# Altium PCB standos_rpi_com.PcbDoc (part 2 of 2)
Units mm, origin at the board's own origin, x right, y up, seen from the top; angles counter-clockwise.
Board outline 197 x 179 mm, 2 copper layers (Top Layer, Bottom Layer); 32 components, 588 nets, 1605 pads, 102 vias.
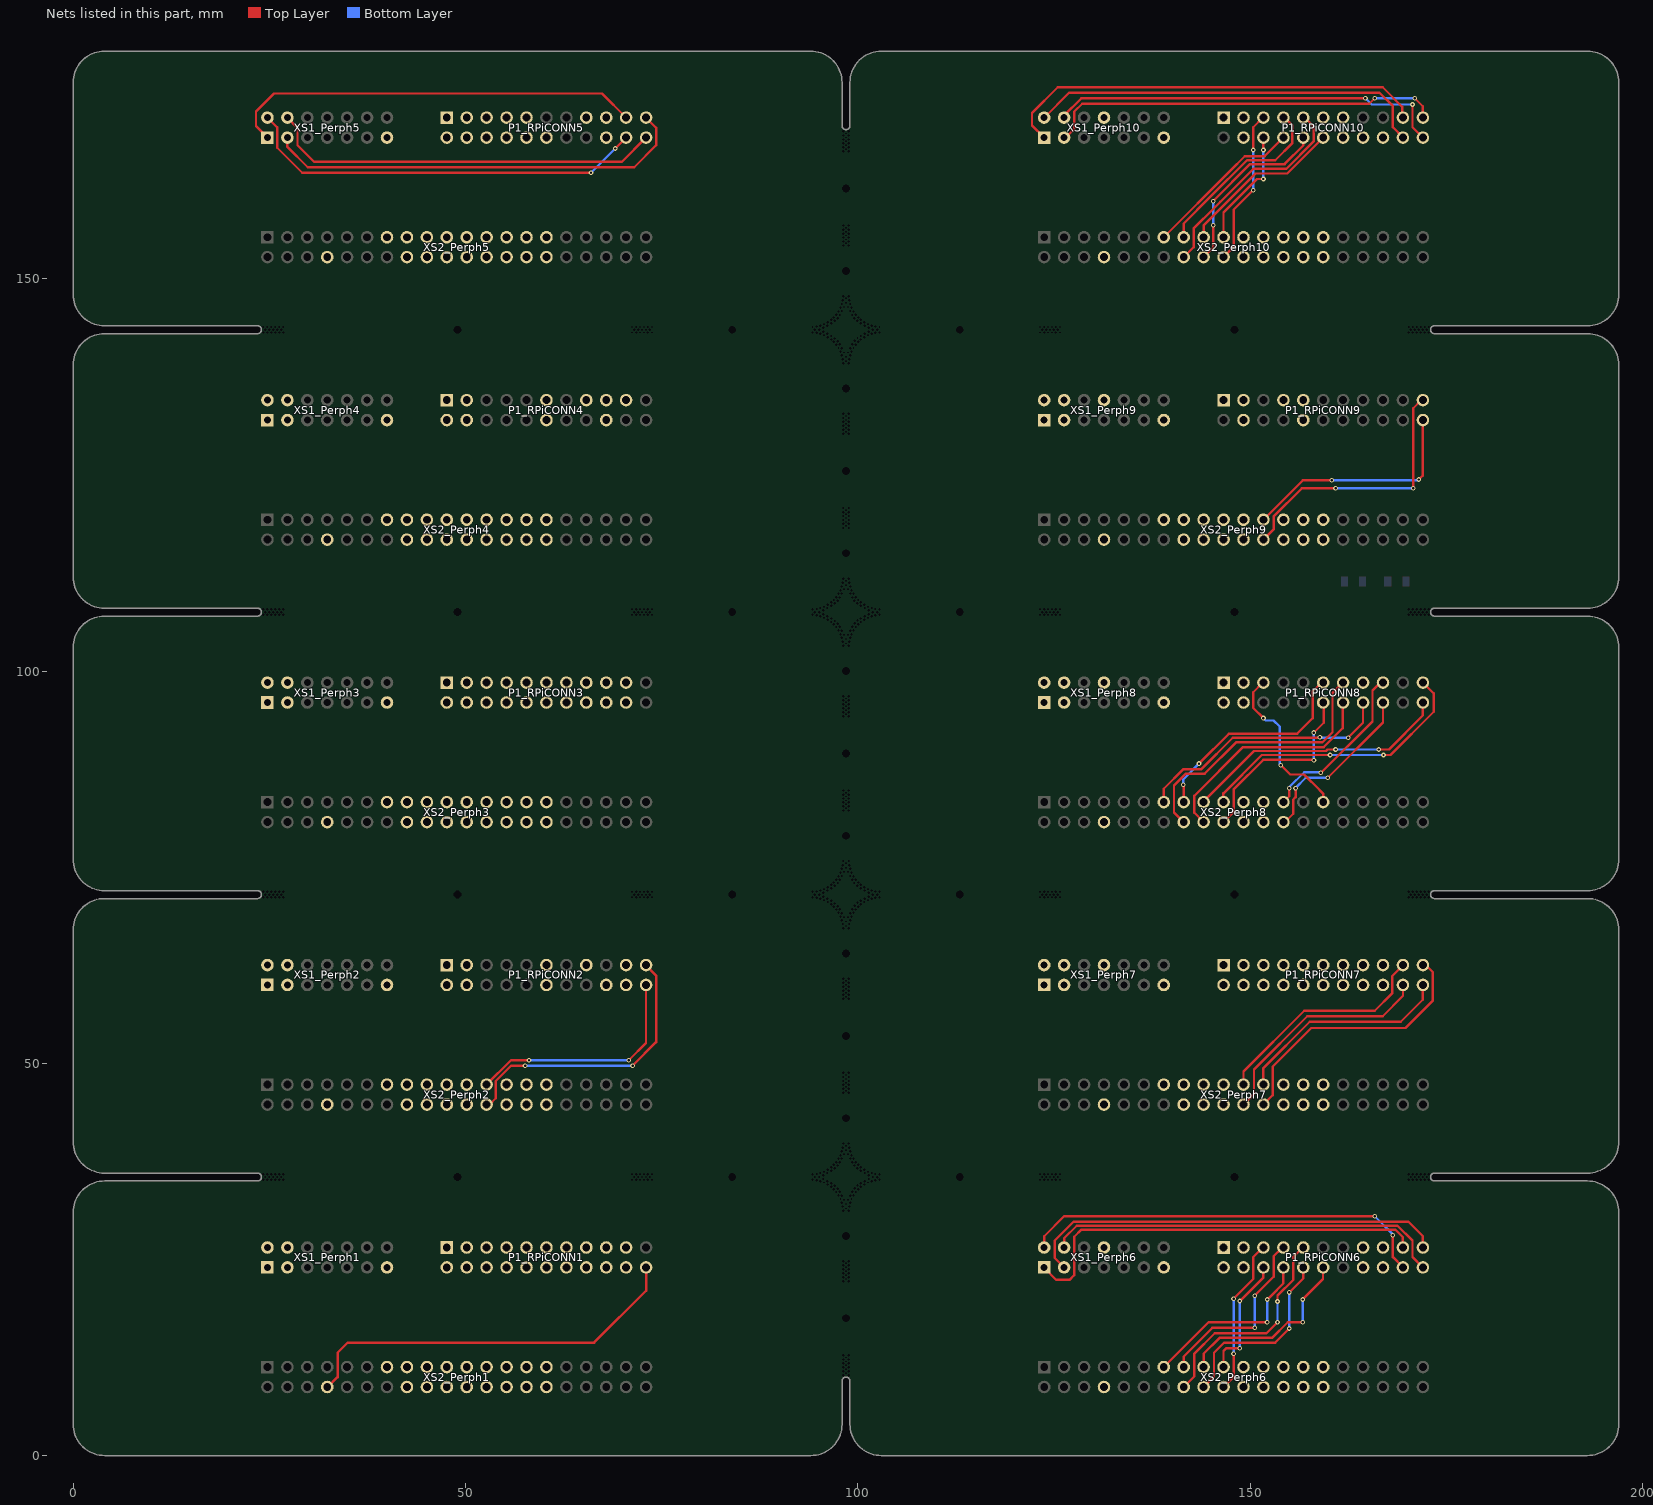
[diagram p2: the nets of this part, all layers, seen from the top]

## Via types
v1: diameter 0.6, hole 0.3, Top Layer to Bottom Layer, 102 vias

## Nets (pads, with @x,y where several pads share a name; then routed paths per layer and width w, separated by ;. In a path a pad name is that pad's centre, name@x,y a point inside that pad or via, vN(x,y) a via of type N, cw(c..) or ccw(c..) an arc to the next point about the centre after c; other vN are vias at no path point) (continued)
GYROSCOPE.SDO_Perph6: XS1_Perph6.8
GYROSCOPE.SDO_Perph7: XS1_Perph7.8
GYROSCOPE.SDO_Perph8: XS1_Perph8.8
GYROSCOPE.SDO_Perph9: XS1_Perph9.8
GYROSCOPE.SDO_Perph10: XS1_Perph10.8
KEYPAD.Col0_Perph1: XS2_Perph1.16
KEYPAD.Col0_Perph2: XS2_Perph2.16
KEYPAD.Col0_Perph3: XS2_Perph3.16
KEYPAD.Col0_Perph4: XS2_Perph4.16
KEYPAD.Col0_Perph5: XS2_Perph5.16
KEYPAD.Col0_Perph6: P1_RPiCONN6.9 XS2_Perph6.16 | length 27.9
  Top Layer w0.3: XS2_Perph6.16@141.54,8.745 142.9,10.105 142.9,13 145.5,15.6 152.1,15.6 v1(153.5,17) ; v1(153.5,19.65) 153.5,20.4 155.5,22.4 155.5,25.3 P1_RPiCONN6.9@156.7,26.5
  Bottom Layer w0.3: v1(153.5,17) 153.5,19.5 v1(153.5,19.65)
KEYPAD.Col0_Perph7: XS2_Perph7.16
KEYPAD.Col0_Perph8: P1_RPiCONN8.13 XS2_Perph8.16 | length 34.9
  Top Layer w0.3: XS2_Perph8.16@141.54,80.745 140.3,81.985 140.3,85.4 141.824,86.924 144.224,86.924 148.2,90.9 159.2,90.9 160.5,92.2 160.5,97.2 P1_RPiCONN8.13@161.7,98.4
KEYPAD.Col0_Perph9: XS2_Perph9.16
KEYPAD.Col0_Perph10: P1_RPiCONN10.9 XS2_Perph10.16 | length 27.8
  Top Layer w0.3: XS2_Perph10.16@141.54,152.745 142.8,154.005 142.8,156.393 145.517,159.11 146.2,159.793 150.407,164 154.6,164 158.1,167.5 158.1,169.4 156.9,170.6 P1_RPiCONN10.9@156.8,170.6
KEYPAD.Col1_Perph1: XS2_Perph1.13
KEYPAD.Col1_Perph2: XS2_Perph2.13
KEYPAD.Col1_Perph3: XS2_Perph3.13
KEYPAD.Col1_Perph4: XS2_Perph4.13
KEYPAD.Col1_Perph5: XS2_Perph5.13
KEYPAD.Col1_Perph6: P1_RPiCONN6.8 XS2_Perph6.13 | length 23.4
  Top Layer w0.3: XS2_Perph6.13@139,11.285 144.715,17 v1(152.168,17) ; v1(152.2,19.9) 152.65,20.35 154.24,21.94 P1_RPiCONN6.8@154.24,23.985
  Bottom Layer w0.3: v1(152.168,17) 152.2,17 v1(152.2,19.9)
KEYPAD.Col1_Perph7: XS2_Perph7.13
KEYPAD.Col1_Perph8: P1_RPiCONN8.16 XS2_Perph8.13 | length 33.3
  Top Layer w0.3: XS2_Perph8.13@139,83.285 139,85 141.5,87.5 143.8,87.5 147.8,91.5 158.9,91.5 v1(158.9,91.55) ; v1(162.5,91.5) 164.4,93.4 P1_RPiCONN8.16@164.4,95.985
  Bottom Layer w0.3: v1(158.9,91.55) 158.9,91.5 v1(162.5,91.5)
KEYPAD.Col1_Perph9: XS2_Perph9.13
KEYPAD.Col1_Perph10: P1_RPiCONN10.8 XS2_Perph10.13 | length 20.5
  Top Layer w0.3: XS2_Perph10.13@139,155.285 147.515,163.8 149.315,165.6 151.855,165.6 P1_RPiCONN10.8@154.24,167.985
KEYPAD.Col2_Perph1: XS2_Perph1.18
KEYPAD.Col2_Perph2: XS2_Perph2.18
KEYPAD.Col2_Perph3: XS2_Perph3.18
KEYPAD.Col2_Perph4: XS2_Perph4.18
KEYPAD.Col2_Perph5: XS2_Perph5.18
KEYPAD.Col2_Perph6: P1_RPiCONN6.10 XS2_Perph6.18 | length 24.2
  Top Layer w0.3: XS2_Perph6.18@144.08,8.745 145.4,10.065 145.4,13.1 146.7,14.4 153.2,14.4 v1(155,16.2) ; v1(155,20.8) 156.8,22.6 P1_RPiCONN6.10@156.8,23.9
  Bottom Layer w0.3: v1(155,16.2) v1(155,20.8)
KEYPAD.Col2_Perph7: XS2_Perph7.18
KEYPAD.Col2_Perph8: P1_RPiCONN8.14 XS2_Perph8.18 | length 29.6
  Top Layer w0.3: XS2_Perph8.18@144.08,80.745 142.9,81.925 142.9,84.1 149.1,90.3 155.837,90.3 157.363,90.3 159.4,90.3 161.8,92.7 P1_RPiCONN8.14@161.8,96
KEYPAD.Col2_Perph9: XS2_Perph9.18
KEYPAD.Col2_Perph10: P1_RPiCONN10.10 XS2_Perph10.18 | length 23.1
  Top Layer w0.3: XS2_Perph10.18@144.08,152.745 145.3,153.965 v1(145.3,156.8) ; v1(145.31,159.89) 145.3,159.9 150,164.6 154.4,164.6 156.78,166.98 P1_RPiCONN10.10@156.78,167.985
  Bottom Layer w0.3: v1(145.3,156.8) 145.3,159.89 v1(145.31,159.89)
KEYPAD.Row0_Perph1: XS2_Perph1.15
KEYPAD.Row0_Perph2: XS2_Perph2.15
KEYPAD.Row0_Perph3: XS2_Perph3.15
KEYPAD.Row0_Perph4: XS2_Perph4.15
KEYPAD.Row0_Perph5: XS2_Perph5.15
KEYPAD.Row0_Perph6: P1_RPiCONN6.7 XS2_Perph6.15 | length 23.5
  Top Layer w0.3: XS2_Perph6.15@141.54,11.285 141.54,12.64 145.2,16.3 v1(150.6,16.3) ; v1(150.61,20.39) 150.6,20.4 153,22.8 153,25.4 P1_RPiCONN6.7@154,26.4
  Bottom Layer w0.3: v1(150.6,16.3) 150.6,20.39 v1(150.61,20.39)
KEYPAD.Row0_Perph7: XS2_Perph7.15
KEYPAD.Row0_Perph8: P1_RPiCONN8.11 XS2_Perph8.15 | length 27.8
  Top Layer w0.3: v1(141.5,85.5) 141.54,85.46 XS2_Perph8.15@141.54,83.285 ; v1(143.5,88.2) 147.3,92 156,92 158,94 158,97.4 P1_RPiCONN8.11@159.2,98.6
  Bottom Layer w0.3: v1(141.5,85.5) 141.5,86.2 v1(143.5,88.2)
KEYPAD.Row0_Perph9: XS2_Perph9.15
KEYPAD.Row0_Perph10: P1_RPiCONN10.7 XS2_Perph10.15 | length 23.8
  Top Layer w0.3: XS2_Perph10.15@141.54,155.285 141.54,157.04 144.9,160.4 149.6,165.1 153.2,165.1 155.39,167.29 155.39,167.597 155.39,169.51 P1_RPiCONN10.7@154.2,170.7
KEYPAD.Row1_Perph1: XS2_Perph1.20
KEYPAD.Row1_Perph2: XS2_Perph2.20
KEYPAD.Row1_Perph3: XS2_Perph3.20
KEYPAD.Row1_Perph4: XS2_Perph4.20
KEYPAD.Row1_Perph5: XS2_Perph5.20
KEYPAD.Row1_Perph6: P1_RPiCONN6.5 XS2_Perph6.20 | length 20
  Top Layer w0.3: XS2_Perph6.20@146.62,8.745 147.9,10.025 v1(147.9,13) ; v1(147.9,20) 150.4,22.5 150.4,25.3 P1_RPiCONN6.5@151.7,26.6
  Bottom Layer w0.3: v1(147.9,13) v1(147.9,20)
KEYPAD.Row1_Perph7: XS2_Perph7.20
KEYPAD.Row1_Perph8: P1_RPiCONN8.12 XS2_Perph8.20 | length 24.4
  Top Layer w0.3: XS2_Perph8.20@146.62,80.745 147.9,82.025 147.9,84.9 151.7,88.7 158,88.7 158.1,88.6 v1(158.135,88.635) ; v1(158.1,92.15) 158.125,92.125 159.4,93.4 P1_RPiCONN8.12@159.4,95.9
  Bottom Layer w0.3: v1(158.1,92.15) 158.1,92.1 158.1,88.635 v1(158.135,88.635)
KEYPAD.Row1_Perph9: XS2_Perph9.20
KEYPAD.Row1_Perph10: P1_RPiCONN10.5 XS2_Perph10.20 | length 19.8
  Top Layer w0.3: XS2_Perph10.20@146.62,152.745 147.9,154.025 147.9,158.8 150.4,161.3 v1(150.41,161.29) ; v1(150.4,166.4) 150.4,169.3 P1_RPiCONN10.5@151.6,170.5
  Bottom Layer w0.3: v1(150.4,166.4) 150.4,161.3 v1(150.41,161.29)
KEYPAD.Row2_Perph1: XS2_Perph1.19
KEYPAD.Row2_Perph2: XS2_Perph2.19
KEYPAD.Row2_Perph3: XS2_Perph3.19
KEYPAD.Row2_Perph4: XS2_Perph4.19
KEYPAD.Row2_Perph5: XS2_Perph5.19
KEYPAD.Row2_Perph6: P1_RPiCONN6.6 XS2_Perph6.19 | length 15.8
  Top Layer w0.3: XS2_Perph6.19@146.62,11.285 146.62,13.32 147,13.7 v1(148.7,13.7) ; v1(148.7,19.7) 151.7,22.7 P1_RPiCONN6.6@151.7,23.985
  Bottom Layer w0.3: v1(148.7,13.7) 148.7,14.2 v1(148.7,19.7)
KEYPAD.Row2_Perph7: XS2_Perph7.19
KEYPAD.Row2_Perph8: P1_RPiCONN8.21 XS2_Perph8.19 | length 36.6
  Top Layer w0.3: XS2_Perph8.19@146.6,83.2 146.6,84.4 151.485,89.285 157.866,89.285 158.405,89.285 v1@160.185,89.285 ; v1(167,89.3) 167.9,89.3 173.4,94.8 173.4,97.145 P1_RPiCONN8.21@172.02,98.525
  Bottom Layer w0.3: v1(160.2,89.3) v1(167,89.3)
KEYPAD.Row2_Perph9: XS2_Perph9.19
KEYPAD.Row2_Perph10: P1_RPiCONN10.6 XS2_Perph10.19 | length 15.1
  Top Layer w0.3: XS2_Perph10.19@146.62,155.285 146.62,158.42 150.9,162.7 v1(151.7,162.7) ; v1(151.7,166.4) P1_RPiCONN10.6@151.7,167.8
  Bottom Layer w0.3: v1(151.7,162.7) v1(151.7,166.4)
KEYPAD.Row3_Perph1: XS2_Perph1.17
KEYPAD.Row3_Perph2: XS2_Perph2.17
KEYPAD.Row3_Perph3: XS2_Perph3.17
KEYPAD.Row3_Perph4: XS2_Perph4.17
KEYPAD.Row3_Perph5: XS2_Perph5.17
KEYPAD.Row3_Perph6: P1_RPiCONN6.12 XS2_Perph6.17 | length 24.1
  Top Layer w0.3: XS2_Perph6.17@144.08,11.285 144.08,12.98 146.1,15 152.8,15 154.8,17 v1(156.7,17) ; v1(156.7,19.9) 159.3,22.5 P1_RPiCONN6.12@159.3,24
  Bottom Layer w0.3: v1(156.7,17) v1(156.7,19.9)
KEYPAD.Row3_Perph7: XS2_Perph7.17
KEYPAD.Row3_Perph8: P1_RPiCONN8.22 XS2_Perph8.17 | length 34.2
  Top Layer w0.3: XS2_Perph8.17@144,83.3 150.5,89.8 156.044,89.8 159.681,89.8 159.731,89.85 159.881,90 v1(160.9,90) ; v1(166.4,90) 167.7,90 172.02,94.32 P1_RPiCONN8.22@172.02,95.985
  Bottom Layer w0.3: v1(160.9,90) v1(166.4,90)
KEYPAD.Row3_Perph9: XS2_Perph9.17
KEYPAD.Row3_Perph10: P1_RPiCONN10.12 XS2_Perph10.17 | length 21.4
  Top Layer w0.3: XS2_Perph10.17@144.08,155.285 144.08,156.78 150.7,163.4 154.735,163.4 P1_RPiCONN10.12@159.32,167.985
MICROPHONE_DS_Perph1: P1_RPiCONN1.22 XS2_Perph1.8 | length 50.5
  Top Layer w0.3: XS2_Perph1.8@32.4,8.7 33.7,10 33.7,13.1 35,14.4 66.4,14.4 73.02,21.02 P1_RPiCONN1.22@73.02,23.985
MICROPHONE_DS_Perph2: XS2_Perph2.8
MICROPHONE_DS_Perph3: XS2_Perph3.8
MICROPHONE_DS_Perph4: XS2_Perph4.8
MICROPHONE_DS_Perph5: XS2_Perph5.8
MICROPHONE_DS_Perph6: XS2_Perph6.8
MICROPHONE_DS_Perph7: XS2_Perph7.8
MICROPHONE_DS_Perph8: XS2_Perph8.8
MICROPHONE_DS_Perph9: XS2_Perph9.8
MICROPHONE_DS_Perph10: XS2_Perph10.8
NetP1_RPiCONN1_1: P1_RPiCONN1.1
NetP1_RPiCONN1_2: P1_RPiCONN1.2
NetP1_RPiCONN1_15: P1_RPiCONN1.15
NetP1_RPiCONN2_1: P1_RPiCONN2.1
NetP1_RPiCONN2_2: P1_RPiCONN2.2
NetP1_RPiCONN2_15: P1_RPiCONN2.15
NetP1_RPiCONN3_1: P1_RPiCONN3.1
NetP1_RPiCONN3_2: P1_RPiCONN3.2
NetP1_RPiCONN3_15: P1_RPiCONN3.15
NetP1_RPiCONN4_1: P1_RPiCONN4.1
NetP1_RPiCONN4_2: P1_RPiCONN4.2
NetP1_RPiCONN4_15: P1_RPiCONN4.15
NetP1_RPiCONN5_1: P1_RPiCONN5.1
NetP1_RPiCONN5_2: P1_RPiCONN5.2
NetP1_RPiCONN5_15: P1_RPiCONN5.15
NetP1_RPiCONN6_1: P1_RPiCONN6.1
NetP1_RPiCONN6_2: P1_RPiCONN6.2
NetP1_RPiCONN6_15: P1_RPiCONN6.15
NetP1_RPiCONN7_1: P1_RPiCONN7.1
NetP1_RPiCONN7_2: P1_RPiCONN7.2
NetP1_RPiCONN7_15: P1_RPiCONN7.15
NetP1_RPiCONN8_1: P1_RPiCONN8.1
NetP1_RPiCONN8_2: P1_RPiCONN8.2
NetP1_RPiCONN8_15: P1_RPiCONN8.15
NetP1_RPiCONN9_1: P1_RPiCONN9.1
NetP1_RPiCONN10_1: P1_RPiCONN10.1
PGND_Perph1: XS1_Perph1.13
PGND_Perph2: XS1_Perph2.13
PGND_Perph3: XS1_Perph3.13
PGND_Perph4: XS1_Perph4.13
PGND_Perph5: XS1_Perph5.13
PGND_Perph6: XS1_Perph6.13
PGND_Perph7: XS1_Perph7.13
PGND_Perph8: XS1_Perph8.13
PGND_Perph9: XS1_Perph9.13
PGND_Perph10: XS1_Perph10.13
RFID.IRQ_Perph1: XS2_Perph1.25
RFID.IRQ_Perph2: XS2_Perph2.25
RFID.IRQ_Perph3: XS2_Perph3.25
RFID.IRQ_Perph4: XS2_Perph4.25
RFID.IRQ_Perph5: XS2_Perph5.25
RFID.IRQ_Perph6: XS2_Perph6.25
RFID.IRQ_Perph7: XS2_Perph7.25
RFID.IRQ_Perph8: P1_RPiCONN8.17 XS2_Perph8.25 | length 21.9
  Top Layer w0.3: XS2_Perph8.25@154.24,83.285 155,84.045 v1(155,85.05) ; v1(159.025,87.05) 159.05,87.025 165.6,93.575 165.6,97.5 P1_RPiCONN8.17@166.7,98.6
  Bottom Layer w0.3: v1(155,85.05) 155,85.1 155,85.2 156.9,87.1 158.9,87.1 159,87 159.025,87.025 v1(159.025,87.05)
RFID.IRQ_Perph9: XS2_Perph9.25
RFID.IRQ_Perph10: XS2_Perph10.25
RFID.RST_Perph1: XS2_Perph1.26
RFID.RST_Perph2: XS2_Perph2.26
RFID.RST_Perph3: XS2_Perph3.26
RFID.RST_Perph4: XS2_Perph4.26
RFID.RST_Perph5: XS2_Perph5.26
RFID.RST_Perph6: XS2_Perph6.26
RFID.RST_Perph7: XS2_Perph7.26
RFID.RST_Perph8: P1_RPiCONN8.18 XS2_Perph8.26 | length 22.1
  Top Layer w0.3: XS2_Perph8.26@154.4,80.7 155.5,81.8 155.5,82.607 155.5,83.631 155.8,83.931 v1(155.8,85.05) ; v1(159.9,86.4) 166.94,93.44 P1_RPiCONN8.18@166.94,95.985
  Bottom Layer w0.3: v1(155.8,85.05) 155.8,85.1 157.1,86.4 v1(159.9,86.4)
RFID.RST_Perph9: XS2_Perph9.26
RFID.RST_Perph10: XS2_Perph10.26
RFID.SPI.MISO_Perph1: XS2_Perph1.28
RFID.SPI.MISO_Perph2: XS2_Perph2.28
RFID.SPI.MISO_Perph3: XS2_Perph3.28
RFID.SPI.MISO_Perph4: XS2_Perph4.28
RFID.SPI.MISO_Perph5: XS2_Perph5.28
RFID.SPI.MISO_Perph6: XS2_Perph6.28
RFID.SPI.MISO_Perph7: XS2_Perph7.28
RFID.SPI.MISO_Perph9: XS2_Perph9.28
RFID.SPI.MISO_Perph10: XS2_Perph10.28
RFID.SPI.MOSI_Perph1: XS2_Perph1.27
RFID.SPI.MOSI_Perph2: XS2_Perph2.27
RFID.SPI.MOSI_Perph3: XS2_Perph3.27
RFID.SPI.MOSI_Perph4: XS2_Perph4.27
RFID.SPI.MOSI_Perph5: XS2_Perph5.27
RFID.SPI.MOSI_Perph6: XS2_Perph6.27
RFID.SPI.MOSI_Perph7: XS2_Perph7.27
RFID.SPI.MOSI_Perph9: XS2_Perph9.27
RFID.SPI.MOSI_Perph10: XS2_Perph10.27
RFID.SPI.nCE_Perph1: XS2_Perph1.29
RFID.SPI.nCE_Perph2: XS2_Perph2.29
RFID.SPI.nCE_Perph3: XS2_Perph3.29
RFID.SPI.nCE_Perph4: XS2_Perph4.29
RFID.SPI.nCE_Perph5: XS2_Perph5.29
RFID.SPI.nCE_Perph6: XS2_Perph6.29
RFID.SPI.nCE_Perph7: XS2_Perph7.29
RFID.SPI.nCE_Perph8: P1_RPiCONN8.5 XS2_Perph8.29 | length 21
  Top Layer w0.3: P1_RPiCONN8.5@151.6,98.5 150.4,97.3 150.4,95.3 v1(151.7,94) ; v1(153.919,88) 155.119,86.8 156.1,86.8 156.893,86.8 158.896,84.796 158.946,84.746 159,84.693 159.046,84.646 159.096,84.596 159.146,84.546 159.196,84.496 159.32,84.373 159.32,83.58 XS2_Perph8.29@159.32,83.285
  Bottom Layer w0.3: v1(151.7,94) 152,93.7 153,93.7 153.8,92.9 153.8,88.1 153.9,88 v1(153.919,88)
RFID.SPI.nCE_Perph9: XS2_Perph9.29
RFID.SPI.nCE_Perph10: XS2_Perph10.29
RFID.SPI.SCLK_Perph1: XS2_Perph1.30
RFID.SPI.SCLK_Perph2: XS2_Perph2.30
RFID.SPI.SCLK_Perph3: XS2_Perph3.30
RFID.SPI.SCLK_Perph4: XS2_Perph4.30
RFID.SPI.SCLK_Perph5: XS2_Perph5.30
RFID.SPI.SCLK_Perph6: XS2_Perph6.30
RFID.SPI.SCLK_Perph7: XS2_Perph7.30
RFID.SPI.SCLK_Perph9: XS2_Perph9.30
RFID.SPI.SCLK_Perph10: XS2_Perph10.30
RPi_GPIO.GPIO08_RPiCONN2: P1_RPiCONN2.22 XS2_Perph2.23 | length 29.9
  Top Layer w0.3: XS2_Perph2.23@52.7,47.285 55.815,50.4 v1(58.1,50.4) ; v1(70.8,50.4) 73,52.6 P1_RPiCONN2.22@73,60
  Bottom Layer w0.3: v1(58.1,50.4) v1(70.8,50.4)
RPi_GPIO.GPIO08_RPiCONN5: P1_RPiCONN5.22 XS1_Perph5.4 | length 50.6
  Top Layer w0.3: XS1_Perph5.4@27.3,170.525 28.6,169.225 28.6,167 30.7,164.9 69.935,164.9 P1_RPiCONN5.22@73.02,167.985
RPi_GPIO.GPIO08_RPiCONN6: P1_RPiCONN6.22 XS1_Perph6.4 | length 50.9
  Top Layer w0.3: XS1_Perph6.4@126.3,26.525 126.3,27.7 127.9,29.3 ; 128,29.3 168.8,29.3 170.7,27.4 170.7,25.305 P1_RPiCONN6.22@172.02,23.985
RPi_GPIO.GPIO08_RPiCONN7: P1_RPiCONN7.22 XS2_Perph7.23 | length 28
  Top Layer w0.3: XS2_Perph7.23@151.7,47.285 151.7,49.4 157.6,55.3 169.2,55.3 172,58.1 P1_RPiCONN7.22@172,60.1
RPi_GPIO.GPIO08_RPiCONN9: P1_RPiCONN9.22 XS2_Perph9.23 | length 29.6
  Top Layer w0.3: XS2_Perph9.23@151.7,119.285 156.715,124.3 v1(160.4,124.3) ; v1(171.5,124.4) 172,124.9 172,125.219 P1_RPiCONN9.22@172,131.9
  Bottom Layer w0.3: v1(160.4,124.3) 162.351,124.3 171.4,124.3 v1(171.5,124.4)
RPi_GPIO.GPIO08_RPiCONN10: P1_RPiCONN10.22 XS1_Perph10.4 | length 50.7
  Top Layer w0.3: XS1_Perph10.4@126.3,170.525 126.3,170.8 128.5,173 v1(164.7,173) ; v1(170.7,172.2) 170.7,169.3 P1_RPiCONN10.22@172,168
  Bottom Layer w0.3: v1(164.7,173) 165.5,172.2 v1(170.7,172.2)
RPi_GPIO.GPIO11_RPiCONN2: P1_RPiCONN2.21 XS2_Perph2.24 | length 36.5
  Top Layer w0.3: XS2_Perph2.24@52.7,44.745 53.045,44.745 53.85,45.55 53.85,47.728 55.822,49.7 v1(57.6,49.7) ; v1(71.3,49.7) 74.3,52.7 74.3,61.2 P1_RPiCONN2.21@73,62.5
  Bottom Layer w0.3: v1(57.6,49.7) v1(71.3,49.7)
RPi_GPIO.GPIO11_RPiCONN5: P1_RPiCONN5.21 XS1_Perph5.3 | length 54.5
  Top Layer w0.3: XS1_Perph5.3@27.3,167.985 27.3,166.8 29.9,164.2 30.8,164.2 71.5,164.2 74.3,167 74.3,169.245 P1_RPiCONN5.21@73.02,170.525
RPi_GPIO.GPIO11_RPiCONN6: P1_RPiCONN6.21 XS1_Perph6.3 | length 54
  Top Layer w0.3: XS1_Perph6.3@126.3,24 125.1,25.2 125.1,27.4 127.5,29.8 170.2,29.8 172.02,27.98 P1_RPiCONN6.21@172.02,26.525
RPi_GPIO.GPIO11_RPiCONN7: P1_RPiCONN7.21 XS2_Perph7.24 | length 34.2
  Top Layer w0.3: XS2_Perph7.24@151.7,44.745 152.9,45.945 152.9,49.6 157.8,54.5 169.8,54.5 173.3,58 173.3,61.6 P1_RPiCONN7.21@172.3,62.6
RPi_GPIO.GPIO11_RPiCONN9: P1_RPiCONN9.21 XS2_Perph9.24 | length 34.4
  Top Layer w0.3: XS2_Perph9.24@151.7,116.745 153,118.045 153,119.7 156.6,123.3 v1(160.9,123.3) ; v1(170.81,123.31) 170.8,123.31 170.8,133.5 P1_RPiCONN9.21@171.8,134.5
  Bottom Layer w0.3: v1(160.9,123.3) 170.8,123.3 v1(170.81,123.31)
RPi_GPIO.GPIO11_RPiCONN10: P1_RPiCONN10.21 XS1_Perph10.3 | length 50.9
  Top Layer w0.3: XS1_Perph10.3@126.4,167.9 127.6,169.1 127.6,171.3 128.6,172.3 165.2,172.3 v1(165.9,173) ; v1(171,173) 172.02,171.98 P1_RPiCONN10.21@172.02,170.525
  Bottom Layer w0.3: v1(165.9,173) v1(171,173)
RPi_GPIO.GPIO12_RPiCONN1: P1_RPiCONN1.17
RPi_GPIO.GPIO12_RPiCONN3: P1_RPiCONN3.17
RPi_GPIO.GPIO12_RPiCONN4: P1_RPiCONN4.17
RPi_GPIO.GPIO12_RPiCONN5: P1_RPiCONN5.17
RPi_GPIO.GPIO12_RPiCONN6: P1_RPiCONN6.17
RPi_GPIO.GPIO12_RPiCONN7: P1_RPiCONN7.17
RPi_GPIO.GPIO13_RPiCONN1: P1_RPiCONN1.18
RPi_GPIO.GPIO13_RPiCONN2: P1_RPiCONN2.18
RPi_GPIO.GPIO13_RPiCONN3: P1_RPiCONN3.18
RPi_GPIO.GPIO13_RPiCONN4: P1_RPiCONN4.18
RPi_GPIO.GPIO13_RPiCONN5: P1_RPiCONN5.18
RPi_GPIO.GPIO13_RPiCONN6: P1_RPiCONN6.18
RPi_GPIO.GPIO13_RPiCONN7: P1_RPiCONN7.18
RPi_GPIO.GPIO13_RPiCONN10: P1_RPiCONN10.18
RPi_GPIO.GPIO26_RPiCONN1: P1_RPiCONN1.20
RPi_GPIO.GPIO26_RPiCONN2: P1_RPiCONN2.20
RPi_GPIO.GPIO26_RPiCONN3: P1_RPiCONN3.20
RPi_GPIO.GPIO26_RPiCONN5: P1_RPiCONN5.20 XS1_Perph5.2 | length 52
  Top Layer w0.3: XS1_Perph5.2@24.76,170.525 26,169.285 26,166.7 29.2,163.5 v1(66,163.5) ; v1(69.1,166.6) 69.1,166.605 P1_RPiCONN5.20@70.48,167.985
  Bottom Layer w0.3: v1(66,163.5) v1(69.1,166.6)
RPi_GPIO.GPIO26_RPiCONN6: P1_RPiCONN6.20 XS1_Perph6.2 | length 52.5
  Top Layer w0.3: XS1_Perph6.2@123.76,26.525 123.76,27.96 126.3,30.5 v1(165.9,30.5) ; v1(168.2,28.1) 168.2,25.3 P1_RPiCONN6.20@169.4,24.1
  Bottom Layer w0.3: v1(165.9,30.5) 168.2,28.2 v1(168.2,28.1)
RPi_GPIO.GPIO26_RPiCONN7: P1_RPiCONN7.20 XS2_Perph7.22 | length 29.2
  Top Layer w0.3: XS2_Perph7.22@149.16,44.745 150.5,46.085 150.5,49.2 157.3,56 166.9,56 169.5,58.6 P1_RPiCONN7.20@169.5,59.9
RPi_GPIO.GPIO26_RPiCONN10: P1_RPiCONN10.20 XS1_Perph10.2 | length 51
  Top Layer w0.3: XS1_Perph10.2@123.76,170.525 126.935,173.7 166.5,173.7 168.2,172 168.2,169.3 P1_RPiCONN10.20@169.5,168
RPi_GPIO.GPIO27_RPiCONN1: P1_RPiCONN1.19
RPi_GPIO.GPIO27_RPiCONN2: P1_RPiCONN2.19
RPi_GPIO.GPIO27_RPiCONN3: P1_RPiCONN3.19
RPi_GPIO.GPIO27_RPiCONN4: P1_RPiCONN4.19
RPi_GPIO.GPIO27_RPiCONN5: P1_RPiCONN5.19 XS1_Perph5.1 | length 53.3
  Top Layer w0.3: XS1_Perph5.1@24.76,167.985 23.3,169.445 23.3,171.3 25.6,173.6 67.405,173.6 P1_RPiCONN5.19@70.48,170.525
RPi_GPIO.GPIO27_RPiCONN6: P1_RPiCONN6.19 XS1_Perph6.1 | length 53.7
  Top Layer w0.3: XS1_Perph6.1@123.7,24 125.3,22.4 127,22.4 127.6,23 127.6,27.9 128.5,28.8 168.5,28.8 169.48,27.82 P1_RPiCONN6.19@169.48,26.525
RPi_GPIO.GPIO27_RPiCONN7: P1_RPiCONN7.19 XS2_Perph7.21 | length 28.9
  Top Layer w0.3: XS2_Perph7.21@149.16,47.285 149.16,48.96 156.9,56.7 165.9,56.7 168.1,58.9 168.1,61.1 P1_RPiCONN7.19@169.5,62.5
RPi_GPIO.GPIO27_RPiCONN10: P1_RPiCONN10.19 XS1_Perph10.1 | length 54.5
  Top Layer w0.3: XS1_Perph10.1@123.76,167.985 122.2,169.545 122.2,171.1 125.5,174.4 166.9,174.4 169.4,171.9 P1_RPiCONN10.19@169.4,170.8
RPi_I2C.SCL_RPiCONN1: P1_RPiCONN1.3
RPi_I2C.SCL_RPiCONN2: P1_RPiCONN2.3
RPi_I2C.SCL_RPiCONN3: P1_RPiCONN3.3
RPi_I2C.SCL_RPiCONN4: P1_RPiCONN4.3
RPi_I2C.SCL_RPiCONN5: P1_RPiCONN5.3
RPi_I2C.SCL_RPiCONN6: P1_RPiCONN6.3
RPi_I2C.SCL_RPiCONN7: P1_RPiCONN7.3
RPi_I2C.SCL_RPiCONN8: P1_RPiCONN8.3
RPi_I2C.SCL_RPiCONN9: P1_RPiCONN9.3
RPi_I2C.SCL_RPiCONN10: P1_RPiCONN10.3
RPi_I2C.SDA_RPiCONN1: P1_RPiCONN1.4
RPi_I2C.SDA_RPiCONN2: P1_RPiCONN2.4
RPi_I2C.SDA_RPiCONN3: P1_RPiCONN3.4
RPi_I2C.SDA_RPiCONN4: P1_RPiCONN4.4
RPi_I2C.SDA_RPiCONN5: P1_RPiCONN5.4
RPi_I2C.SDA_RPiCONN6: P1_RPiCONN6.4
RPi_I2C.SDA_RPiCONN7: P1_RPiCONN7.4
RPi_I2C.SDA_RPiCONN8: P1_RPiCONN8.4
RPi_I2C.SDA_RPiCONN9: P1_RPiCONN9.4
RPi_I2C.SDA_RPiCONN10: P1_RPiCONN10.4
RPi_SPI1.MISO_RPiCONN1: P1_RPiCONN1.10
RPi_SPI1.MISO_RPiCONN3: P1_RPiCONN3.10
RPi_SPI1.MISO_RPiCONN5: P1_RPiCONN5.10
RPi_SPI1.MISO_RPiCONN7: P1_RPiCONN7.10
RPi_SPI1.MISO_RPiCONN9: P1_RPiCONN9.10
RPi_SPI1.MOSI_RPiCONN1: P1_RPiCONN1.9
RPi_SPI1.MOSI_RPiCONN3: P1_RPiCONN3.9
RPi_SPI1.MOSI_RPiCONN5: P1_RPiCONN5.9
RPi_SPI1.MOSI_RPiCONN7: P1_RPiCONN7.9
RPi_SPI1.MOSI_RPiCONN9: P1_RPiCONN9.9
RPi_SPI1.nCE0_RPiCONN1: P1_RPiCONN1.7
RPi_SPI1.nCE0_RPiCONN3: P1_RPiCONN3.7
RPi_SPI1.nCE0_RPiCONN5: P1_RPiCONN5.7
RPi_SPI1.nCE0_RPiCONN7: P1_RPiCONN7.7
RPi_SPI1.nCE0_RPiCONN9: P1_RPiCONN9.7
RPi_SPI1.nCE1_RPiCONN1: P1_RPiCONN1.5
RPi_SPI1.nCE1_RPiCONN3: P1_RPiCONN3.5
RPi_SPI1.nCE1_RPiCONN5: P1_RPiCONN5.5
RPi_SPI1.nCE1_RPiCONN7: P1_RPiCONN7.5
RPi_SPI1.nCE2_RPiCONN1: P1_RPiCONN1.6
RPi_SPI1.nCE2_RPiCONN3: P1_RPiCONN3.6
RPi_SPI1.nCE2_RPiCONN5: P1_RPiCONN5.6
RPi_SPI1.nCE2_RPiCONN7: P1_RPiCONN7.6
RPi_SPI1.SCLK_RPiCONN1: P1_RPiCONN1.8
RPi_SPI1.SCLK_RPiCONN3: P1_RPiCONN3.8
RPi_SPI1.SCLK_RPiCONN5: P1_RPiCONN5.8
RPi_SPI1.SCLK_RPiCONN7: P1_RPiCONN7.8
RPi_SPI4.MISO_RPiCONN1: P1_RPiCONN1.13
RPi_SPI4.MISO_RPiCONN3: P1_RPiCONN3.13
RPi_SPI4.MISO_RPiCONN7: P1_RPiCONN7.13
RPi_SPI4.MISO_RPiCONN10: P1_RPiCONN10.13
RPi_SPI4.MOSI_RPiCONN1: P1_RPiCONN1.16
RPi_SPI4.MOSI_RPiCONN3: P1_RPiCONN3.16
RPi_SPI4.MOSI_RPiCONN6: P1_RPiCONN6.16
RPi_SPI4.MOSI_RPiCONN7: P1_RPiCONN7.16
RPi_SPI4.MOSI_RPiCONN10: P1_RPiCONN10.16
RPi_SPI4.nCE0_RPiCONN1: P1_RPiCONN1.11
RPi_SPI4.nCE0_RPiCONN2: P1_RPiCONN2.11
RPi_SPI4.nCE0_RPiCONN3: P1_RPiCONN3.11
RPi_SPI4.nCE0_RPiCONN4: P1_RPiCONN4.11
RPi_SPI4.nCE0_RPiCONN7: P1_RPiCONN7.11
RPi_SPI4.nCE0_RPiCONN10: P1_RPiCONN10.11
RPi_SPI4.nCE1_RPiCONN1: P1_RPiCONN1.12
RPi_SPI4.nCE1_RPiCONN2: P1_RPiCONN2.12
RPi_SPI4.nCE1_RPiCONN3: P1_RPiCONN3.12
RPi_SPI4.nCE1_RPiCONN4: P1_RPiCONN4.12
RPi_SPI4.nCE1_RPiCONN5: P1_RPiCONN5.12
RPi_SPI4.nCE1_RPiCONN7: P1_RPiCONN7.12
RPi_SPI4.SCLK_RPiCONN1: P1_RPiCONN1.14
RPi_SPI4.SCLK_RPiCONN3: P1_RPiCONN3.14
RPi_SPI4.SCLK_RPiCONN7: P1_RPiCONN7.14
RPi_SPI4.SCLK_RPiCONN10: P1_RPiCONN10.14
STEPMOTOR.IN1_Perph1: XS1_Perph1.4
STEPMOTOR.IN1_Perph2: XS1_Perph2.4
STEPMOTOR.IN1_Perph3: XS1_Perph3.4
STEPMOTOR.IN1_Perph4: XS1_Perph4.4
STEPMOTOR.IN1_Perph7: XS1_Perph7.4
STEPMOTOR.IN1_Perph8: XS1_Perph8.4
STEPMOTOR.IN1_Perph9: XS1_Perph9.4
STEPMOTOR.IN2_Perph1: XS1_Perph1.3
STEPMOTOR.IN2_Perph2: XS1_Perph2.3
STEPMOTOR.IN2_Perph3: XS1_Perph3.3
STEPMOTOR.IN2_Perph4: XS1_Perph4.3
STEPMOTOR.IN2_Perph7: XS1_Perph7.3
STEPMOTOR.IN2_Perph8: XS1_Perph8.3
STEPMOTOR.IN2_Perph9: XS1_Perph9.3
STEPMOTOR.IN3_Perph1: XS1_Perph1.2
STEPMOTOR.IN3_Perph2: XS1_Perph2.2
STEPMOTOR.IN3_Perph3: XS1_Perph3.2
STEPMOTOR.IN3_Perph4: XS1_Perph4.2
STEPMOTOR.IN3_Perph7: XS1_Perph7.2
STEPMOTOR.IN3_Perph8: XS1_Perph8.2
STEPMOTOR.IN3_Perph9: XS1_Perph9.2
STEPMOTOR.IN4_Perph1: XS1_Perph1.1
STEPMOTOR.IN4_Perph2: XS1_Perph2.1
STEPMOTOR.IN4_Perph3: XS1_Perph3.1
STEPMOTOR.IN4_Perph4: XS1_Perph4.1
STEPMOTOR.IN4_Perph7: XS1_Perph7.1
STEPMOTOR.IN4_Perph8: XS1_Perph8.1
STEPMOTOR.IN4_Perph9: XS1_Perph9.1
ULTRASONIC_HC0.ECHO_Perph1: XS2_Perph1.24
ULTRASONIC_HC0.ECHO_Perph3: XS2_Perph3.24
ULTRASONIC_HC0.ECHO_Perph4: XS2_Perph4.24
ULTRASONIC_HC0.ECHO_Perph5: XS2_Perph5.24
ULTRASONIC_HC0.ECHO_Perph6: XS2_Perph6.24
ULTRASONIC_HC0.ECHO_Perph8: XS2_Perph8.24
ULTRASONIC_HC0.ECHO_Perph10: XS2_Perph10.24
ULTRASONIC_HC0.TRIG_Perph1: XS2_Perph1.23
ULTRASONIC_HC0.TRIG_Perph3: XS2_Perph3.23
ULTRASONIC_HC0.TRIG_Perph4: XS2_Perph4.23
ULTRASONIC_HC0.TRIG_Perph5: XS2_Perph5.23
ULTRASONIC_HC0.TRIG_Perph6: XS2_Perph6.23
ULTRASONIC_HC0.TRIG_Perph8: XS2_Perph8.23
ULTRASONIC_HC0.TRIG_Perph10: XS2_Perph10.23
ULTRASONIC_HC1.ECHO_Perph1: XS2_Perph1.21
ULTRASONIC_HC1.ECHO_Perph2: XS2_Perph2.21
ULTRASONIC_HC1.ECHO_Perph3: XS2_Perph3.21
ULTRASONIC_HC1.ECHO_Perph4: XS2_Perph4.21
ULTRASONIC_HC1.ECHO_Perph5: XS2_Perph5.21
ULTRASONIC_HC1.ECHO_Perph6: XS2_Perph6.21
ULTRASONIC_HC1.ECHO_Perph8: XS2_Perph8.21
ULTRASONIC_HC1.ECHO_Perph9: XS2_Perph9.21
ULTRASONIC_HC1.ECHO_Perph10: XS2_Perph10.21
ULTRASONIC_HC1.TRIG_Perph1: XS2_Perph1.22
ULTRASONIC_HC1.TRIG_Perph2: XS2_Perph2.22
ULTRASONIC_HC1.TRIG_Perph3: XS2_Perph3.22
ULTRASONIC_HC1.TRIG_Perph4: XS2_Perph4.22
ULTRASONIC_HC1.TRIG_Perph5: XS2_Perph5.22
ULTRASONIC_HC1.TRIG_Perph6: XS2_Perph6.22
ULTRASONIC_HC1.TRIG_Perph8: XS2_Perph8.22
ULTRASONIC_HC1.TRIG_Perph9: XS2_Perph9.22
ULTRASONIC_HC1.TRIG_Perph10: XS2_Perph10.22
pads on no net: P1_RPiCONN10.2 P1_RPiCONN10.15 XS2_Perph1.1 XS2_Perph1.2 XS2_Perph1.3 XS2_Perph1.4 XS2_Perph1.9 XS2_Perph1.14 XS2_Perph1.39 XS2_Perph2.1 XS2_Perph2.2 XS2_Perph2.3 XS2_Perph2.4 XS2_Perph2.9 XS2_Perph2.14 XS2_Perph2.39 XS2_Perph3.1 XS2_Perph3.2 XS2_Perph3.3 XS2_Perph3.4 XS2_Perph3.9 XS2_Perph3.14 XS2_Perph3.39 XS2_Perph4.1 XS2_Perph4.2 XS2_Perph4.3 XS2_Perph4.4 XS2_Perph4.9 XS2_Perph4.14 XS2_Perph4.39 XS2_Perph5.1 XS2_Perph5.2 XS2_Perph5.3 XS2_Perph5.4 XS2_Perph5.9 XS2_Perph5.14 XS2_Perph5.39 XS2_Perph6.1 XS2_Perph6.2 XS2_Perph6.3 XS2_Perph6.4 XS2_Perph6.9 XS2_Perph6.14 XS2_Perph6.39 XS2_Perph7.1 XS2_Perph7.2 XS2_Perph7.3 XS2_Perph7.4 XS2_Perph7.9 XS2_Perph7.14 XS2_Perph7.39 XS2_Perph8.1 XS2_Perph8.2 XS2_Perph8.3 XS2_Perph8.4 XS2_Perph8.9 XS2_Perph8.14 XS2_Perph8.39 XS2_Perph9.1 XS2_Perph9.2 XS2_Perph9.3 XS2_Perph9.4 XS2_Perph9.9 XS2_Perph9.14 XS2_Perph9.39 XS2_Perph10.1 XS2_Perph10.2 XS2_Perph10.3 XS2_Perph10.4 XS2_Perph10.9 XS2_Perph10.14 XS2_Perph10.39

## Silkscreen, mask and mechanical layers (free items; w line width, h text height)
Top Overlay:
  drawing of 1863 lines, arcs and shapes, not listed
  text "STEPMOTOR" at 5.25,177.25 h0.64
  text "ADS1115" at 15.5,177.25 h0.64
  text "STEPMOTOR" at 104.25,177.25 h0.64
  text "ADS1115" at 114.5,177.25 h0.64
  text "StandOS" at 24.8,176.3 h1.4
  text "StandOS" at 123.8,176.3 h1.4
  text "v.2 2022" at 66.15,176.15 h0.9
  text "v.2 2022" at 165.15,176.15 h0.9
  text "#" at 78.26,173.4 h2.4
  text "#" at 177.26,173.4 h2.4
  text "MOTOR" at 23.702,172.583 h1
  text "GYRO" at 29.282,172.583 h1
  text "9DOF" at 35.632,172.583 h1
  text "PWR" at 45.657,172.583 h1
  text "I2C" at 49.55,172.583 h1
  text "SPI1" at 53.662,172.583 h1
  text "SPI4" at 61.116,172.583 h1
  text "MOTOR" at 122.702,172.583 h1
  text "GYRO" at 128.282,172.583 h1
  text "9DOF" at 134.632,172.583 h1
  text "PWR" at 144.657,172.583 h1
  text "I2C" at 148.55,172.583 h1
  text "SPI1" at 152.662,172.583 h1
  text "SPI4" at 160.116,172.583 h1
  text "GPIO" at 68.736,172.456 h1
  text "GPIO" at 167.736,172.456 h1
  text "AUDIO" at 90.108,169.861 h0.64
  text "AUDIO" at 189.108,169.861 h0.64
  text "GYRO GY-50" at 1.75,169.75 h0.64
  text "KEYPAD COM-08653" at 9.75,169.75 h0.64
  text "DISPLAY MSP3520" at 78,169.75 h0.64
  text "GYRO GY-50" at 100.75,169.75 h0.64
  text "KEYPAD COM-08653" at 108.75,169.75 h0.64
  text "DISPLAY MSP3520" at 177,169.75 h0.64
  text "9DOF" at 2,163.25 h0.64
  text "H0 & H1" at 90.108,163.25 h0.64
  text "9DOF" at 101,163.25 h0.64
  text "H0 & H1" at 189.108,163.25 h0.64
  text "IND" at 192.149,161.757 h0.6
  text "RFID RC522" at 77.625,159.361 h0.64
  text "RFID RC522" at 176.625,159.361 h0.64
  text "H1" at 93.45,159.25 h0.64
  text "H1" at 192.45,159.25 h0.64
  text "Variant 5" at 26,158 h5
  text "TCS34725" at 1.75,156.795 h0.64
  text "TCS34725" at 100.75,156.795 h0.64
  text "LEDS" at 8.858,156.75 h0.64
  text "BUTTONS" at 15.608,156.75 h0.64
  text "LEDS" at 107.858,156.75 h0.64
  text "BUTTONS" at 114.608,156.75 h0.64
  text "Variant 10" at 122,154.302 h5
  text "H0" at 89.784,150.361 h0.64
  text "H0" at 188.784,150.361 h0.64
  text "ENCODER" at 2,150.25 h0.64
  text "KY-038" at 8.608,150.25 h0.64
  text "GL5516" at 15.75,150.25 h0.64
  text "GP2Y0A02YK0F" at 77.67,150.25 h0.64
  text "ENCODER" at 101,150.25 h0.64
  text "KY-038" at 107.608,150.25 h0.64
  text "GL5516" at 114.75,150.25 h0.64
  text "GP2Y0A02YK0F" at 176.67,150.25 h0.64
  text "PWR" at 23.036,149.334 h1
  text "ADC" at 28.872,149.334 h1
  text "ENCODER" at 33.329,149.334 h0.8
  text "KEYPAD" at 40.216,149.334 h1
  text "SONIC" at 48.536,149.334 h1
  text "RFID" at 55.486,149.334 h1
  text "DISPLAY" at 63.846,149.334 h1
  text "PWR" at 122.036,149.334 h1
  text "ADC" at 127.872,149.334 h1
  text "ENCODER" at 132.329,149.334 h0.8
  text "KEYPAD" at 139.216,149.334 h1
  text "SONIC" at 147.536,149.334 h1
  text "RFID" at 154.486,149.334 h1
  text "DISPLAY" at 162.846,149.334 h1
  text "Commutation board for Raspberry Pi" at 31,145 h0.8
  text "Commutation board for Raspberry Pi" at 130,145 h0.8
  text "STEPMOTOR" at 5.25,141.25 h0.64
  text "ADS1115" at 15.5,141.25 h0.64
  text "STEPMOTOR" at 104.25,141.25 h0.64
  text "ADS1115" at 114.5,141.25 h0.64
  text "StandOS" at 24.8,140.3 h1.4
  text "StandOS" at 123.8,140.3 h1.4
  text "v.2 2022" at 66.15,140.15 h0.9
  text "v.2 2022" at 165.15,140.15 h0.9
  text "#" at 78.26,137.4 h2.4
  text "#" at 177.26,137.4 h2.4
  text "MOTOR" at 23.702,136.583 h1
  text "GYRO" at 29.282,136.583 h1
  text "9DOF" at 35.632,136.583 h1
  text "PWR" at 45.657,136.583 h1
  text "I2C" at 49.55,136.583 h1
  text "SPI1" at 53.662,136.583 h1
  text "SPI4" at 61.116,136.583 h1
  text "MOTOR" at 122.702,136.583 h1
  text "GYRO" at 128.282,136.583 h1
  text "9DOF" at 134.632,136.583 h1
  text "PWR" at 144.657,136.583 h1
  text "I2C" at 148.55,136.583 h1
  text "SPI1" at 152.662,136.583 h1
  text "SPI4" at 160.116,136.583 h1
  text "GPIO" at 68.736,136.456 h1
  text "GPIO" at 167.736,136.456 h1
  text "AUDIO" at 90.108,133.861 h0.64
  text "AUDIO" at 189.108,133.861 h0.64
  text "GYRO GY-50" at 1.75,133.75 h0.64
  text "KEYPAD COM-08653" at 9.75,133.75 h0.64
  text "DISPLAY MSP3520" at 78,133.75 h0.64
  text "GYRO GY-50" at 100.75,133.75 h0.64
  text "KEYPAD COM-08653" at 108.75,133.75 h0.64
  text "DISPLAY MSP3520" at 177,133.75 h0.64
  text "9DOF" at 2,127.25 h0.64
  text "H0 & H1" at 90.108,127.25 h0.64
  text "9DOF" at 101,127.25 h0.64
  text "H0 & H1" at 189.108,127.25 h0.64
  text "IND" at 192.149,125.757 h0.6
  text "RFID RC522" at 77.625,123.361 h0.64
  text "RFID RC522" at 176.625,123.361 h0.64
  text "H1" at 93.45,123.25 h0.64
  text "H1" at 192.45,123.25 h0.64
  text "Variant 4" at 26,122 h5
  text "Variant 9" at 125,122 h5
  text "TCS34725" at 1.75,120.795 h0.64
  text "TCS34725" at 100.75,120.795 h0.64
  text "LEDS" at 8.858,120.75 h0.64
  text "BUTTONS" at 15.608,120.75 h0.64
  text "LEDS" at 107.858,120.75 h0.64
  text "BUTTONS" at 114.608,120.75 h0.64
  text "H0" at 89.784,114.361 h0.64
  text "H0" at 188.784,114.361 h0.64
  text "ENCODER" at 2,114.25 h0.64
  text "KY-038" at 8.608,114.25 h0.64
  text "GL5516" at 15.75,114.25 h0.64
  text "GP2Y0A02YK0F" at 77.67,114.25 h0.64
  text "ENCODER" at 101,114.25 h0.64
  text "KY-038" at 107.608,114.25 h0.64
  text "GL5516" at 114.75,114.25 h0.64
  text "GP2Y0A02YK0F" at 176.67,114.25 h0.64
  text "PWR" at 23.036,113.334 h1
  text "ADC" at 28.872,113.334 h1
  text "ENCODER" at 33.329,113.334 h0.8
  text "KEYPAD" at 40.216,113.334 h1
  text "SONIC" at 48.536,113.334 h1
  text "RFID" at 55.486,113.334 h1
  text "DISPLAY" at 63.846,113.334 h1
  text "PWR" at 122.036,113.334 h1
  text "ADC" at 127.872,113.334 h1
  text "ENCODER" at 132.329,113.334 h0.8
  text "KEYPAD" at 139.216,113.334 h1
  text "SONIC" at 147.536,113.334 h1
  text "RFID" at 154.486,113.334 h1
  text "DISPLAY" at 162.846,113.334 h1
  text "Commutation board for Raspberry Pi" at 31,109 h0.8
  text "Commutation board for Raspberry Pi" at 130,109 h0.8
  text "STEPMOTOR" at 5.25,105.25 h0.64
  text "ADS1115" at 15.5,105.25 h0.64
  text "STEPMOTOR" at 104.25,105.25 h0.64
  text "ADS1115" at 114.5,105.25 h0.64
  text "StandOS" at 24.8,104.3 h1.4
  text "StandOS" at 123.8,104.3 h1.4
  text "v.2 2022" at 66.15,104.15 h0.9
  text "v.2 2022" at 165.15,104.15 h0.9
  text "#" at 78.26,101.4 h2.4
  text "#" at 177.26,101.4 h2.4
  text "MOTOR" at 23.702,100.583 h1
  text "GYRO" at 29.282,100.583 h1
  text "9DOF" at 35.632,100.583 h1
  text "PWR" at 45.657,100.583 h1
  text "I2C" at 49.55,100.583 h1
  text "SPI1" at 53.662,100.583 h1
  text "SPI4" at 61.116,100.583 h1
  text "MOTOR" at 122.702,100.583 h1
  text "GYRO" at 128.282,100.583 h1
  text "9DOF" at 134.632,100.583 h1
  text "PWR" at 144.657,100.583 h1
  text "I2C" at 148.55,100.583 h1
  text "SPI1" at 152.662,100.583 h1
  text "SPI4" at 160.116,100.583 h1
  text "GPIO" at 68.736,100.456 h1
  text "GPIO" at 167.736,100.456 h1
  text "AUDIO" at 90.108,97.861 h0.64
  text "AUDIO" at 189.108,97.861 h0.64
  text "GYRO GY-50" at 1.75,97.75 h0.64
  text "KEYPAD COM-08653" at 9.75,97.75 h0.64
  text "DISPLAY MSP3520" at 78,97.75 h0.64
  text "GYRO GY-50" at 100.75,97.75 h0.64
  text "KEYPAD COM-08653" at 108.75,97.75 h0.64
  text "DISPLAY MSP3520" at 177,97.75 h0.64
  text "9DOF" at 2,91.25 h0.64
  text "H0 & H1" at 90.108,91.25 h0.64
  text "9DOF" at 101,91.25 h0.64
  text "H0 & H1" at 189.108,91.25 h0.64
  text "RFID RC522" at 77.625,87.361 h0.64
  text "RFID RC522" at 176.625,87.361 h0.64
  text "H1" at 93.45,87.25 h0.64
  text "H1" at 192.45,87.25 h0.64
  text "Variant 3" at 26,86 h5
  text "Variant 8" at 125,86 h5
  text "TCS34725" at 1.75,84.795 h0.64
  text "TCS34725" at 100.75,84.795 h0.64
  text "LEDS" at 8.858,84.75 h0.64
  text "BUTTONS" at 15.608,84.75 h0.64
  text "LEDS" at 107.858,84.75 h0.64
  text "BUTTONS" at 114.608,84.75 h0.64
  text "H0" at 89.784,78.361 h0.64
  text "H0" at 188.784,78.361 h0.64
  text "ENCODER" at 2,78.25 h0.64
  text "KY-038" at 8.608,78.25 h0.64
  text "GL5516" at 15.75,78.25 h0.64
  text "GP2Y0A02YK0F" at 77.67,78.25 h0.64
  text "ENCODER" at 101,78.25 h0.64
  text "KY-038" at 107.608,78.25 h0.64
  text "GL5516" at 114.75,78.25 h0.64
  text "GP2Y0A02YK0F" at 176.67,78.25 h0.64
  text "PWR" at 23.036,77.334 h1
  text "ADC" at 28.872,77.334 h1
  text "ENCODER" at 33.329,77.334 h0.8
  text "KEYPAD" at 40.216,77.334 h1
  text "SONIC" at 48.536,77.334 h1
  text "RFID" at 55.486,77.334 h1
  text "DISPLAY" at 63.846,77.334 h1
  text "PWR" at 122.036,77.334 h1
  text "ADC" at 127.872,77.334 h1
  text "ENCODER" at 132.329,77.334 h0.8
  text "KEYPAD" at 139.216,77.334 h1
  text "SONIC" at 147.536,77.334 h1
  text "RFID" at 154.486,77.334 h1
  text "DISPLAY" at 162.846,77.334 h1
  text "Commutation board for Raspberry Pi" at 31,73 h0.8
  text "Commutation board for Raspberry Pi" at 130,73 h0.8
  text "STEPMOTOR" at 5.25,69.25 h0.64
  text "ADS1115" at 15.5,69.25 h0.64
  text "STEPMOTOR" at 104.25,69.25 h0.64
  text "ADS1115" at 114.5,69.25 h0.64
  text "StandOS" at 24.8,68.3 h1.4
  text "StandOS" at 123.8,68.3 h1.4
  text "v.2 2022" at 66.15,68.15 h0.9
  text "v.2 2022" at 165.15,68.15 h0.9
  text "#" at 78.26,65.4 h2.4
  text "#" at 177.26,65.4 h2.4
  text "MOTOR" at 23.702,64.583 h1
  text "GYRO" at 29.282,64.583 h1
  text "9DOF" at 35.632,64.583 h1
  text "PWR" at 45.657,64.583 h1
  text "I2C" at 49.55,64.583 h1
  text "SPI1" at 53.662,64.583 h1
  text "SPI4" at 61.116,64.583 h1
  text "MOTOR" at 122.702,64.583 h1
  text "GYRO" at 128.282,64.583 h1
  text "9DOF" at 134.632,64.583 h1
  text "PWR" at 144.657,64.583 h1
  text "I2C" at 148.55,64.583 h1
  text "SPI1" at 152.662,64.583 h1
  text "SPI4" at 160.116,64.583 h1
  text "GPIO" at 68.736,64.456 h1
  text "GPIO" at 167.736,64.456 h1
  text "AUDIO" at 90.108,61.861 h0.64
  text "AUDIO" at 189.108,61.861 h0.64
  text "GYRO GY-50" at 1.75,61.75 h0.64
  text "KEYPAD COM-08653" at 9.75,61.75 h0.64
  text "DISPLAY MSP3520" at 78,61.75 h0.64
  text "GYRO GY-50" at 100.75,61.75 h0.64
  text "KEYPAD COM-08653" at 108.75,61.75 h0.64
  text "DISPLAY MSP3520" at 177,61.75 h0.64
  text "9DOF" at 2,55.25 h0.64
  text "H0 & H1" at 90.108,55.25 h0.64
  text "9DOF" at 101,55.25 h0.64
  text "H0 & H1" at 189.108,55.25 h0.64
  text "IND" at 93.149,53.757 h0.6
  text "SYNC" at 189.475,53.675 h0.5
  text "RFID RC522" at 77.625,51.361 h0.64
  text "RFID RC522" at 176.625,51.361 h0.64
  text "H1" at 93.45,51.25 h0.64
  text "H1" at 192.45,51.25 h0.64
  text "Variant 2" at 26,50 h5
  text "Variant 7" at 125,50 h5
  text "TCS34725" at 1.75,48.795 h0.64
  text "TCS34725" at 100.75,48.795 h0.64
  text "LEDS" at 8.858,48.75 h0.64
  text "BUTTONS" at 15.608,48.75 h0.64
  text "LEDS" at 107.858,48.75 h0.64
  text "BUTTONS" at 114.608,48.75 h0.64
  text "H0" at 89.784,42.361 h0.64
  text "H0" at 188.784,42.361 h0.64
  text "ENCODER" at 2,42.25 h0.64
  text "KY-038" at 8.608,42.25 h0.64
  text "GL5516" at 15.75,42.25 h0.64
  text "GP2Y0A02YK0F" at 77.67,42.25 h0.64
  text "ENCODER" at 101,42.25 h0.64
  text "KY-038" at 107.608,42.25 h0.64
  text "GL5516" at 114.75,42.25 h0.64
  text "GP2Y0A02YK0F" at 176.67,42.25 h0.64
  text "PWR" at 23.036,41.334 h1
  text "ADC" at 28.872,41.334 h1
  text "ENCODER" at 33.329,41.334 h0.8
  text "KEYPAD" at 40.216,41.334 h1
  text "SONIC" at 48.536,41.334 h1
  text "RFID" at 55.486,41.334 h1
  text "DISPLAY" at 63.846,41.334 h1
  text "PWR" at 122.036,41.334 h1
  text "ADC" at 127.872,41.334 h1
  text "ENCODER" at 132.329,41.334 h0.8
  text "KEYPAD" at 139.216,41.334 h1
  text "SONIC" at 147.536,41.334 h1
  text "RFID" at 154.486,41.334 h1
  text "DISPLAY" at 162.846,41.334 h1
  text "Commutation board for Raspberry Pi" at 31,37 h0.8
  text "Commutation board for Raspberry Pi" at 130,37 h0.8
  text "STEPMOTOR" at 5.25,33.25 h0.64
  text "ADS1115" at 15.5,33.25 h0.64
  text "STEPMOTOR" at 104.25,33.25 h0.64
  text "ADS1115" at 114.5,33.25 h0.64
  text "StandOS" at 24.8,32.3 h1.4
  text "StandOS" at 123.8,32.3 h1.4
  text "v.2 2022" at 66.15,32.15 h0.9
  text "v.2 2022" at 165.15,32.15 h0.9
  text "#" at 78.26,29.4 h2.4
  text "#" at 177.26,29.4 h2.4
  text "MOTOR" at 23.702,28.583 h1
  text "GYRO" at 29.282,28.583 h1
  text "9DOF" at 35.632,28.583 h1
  text "PWR" at 45.657,28.583 h1
  text "I2C" at 49.55,28.583 h1
  text "SPI1" at 53.662,28.583 h1
  text "SPI4" at 61.116,28.583 h1
  text "MOTOR" at 122.702,28.583 h1
  text "GYRO" at 128.282,28.583 h1
  text "9DOF" at 134.632,28.583 h1
  text "PWR" at 144.657,28.583 h1
  text "I2C" at 148.55,28.583 h1
  text "SPI1" at 152.662,28.583 h1
  text "SPI4" at 160.116,28.583 h1
  text "GPIO" at 68.736,28.456 h1
  text "GPIO" at 167.736,28.456 h1
  text "AUDIO" at 90.108,25.861 h0.64
  text "AUDIO" at 189.108,25.861 h0.64
  text "GYRO GY-50" at 1.75,25.75 h0.64
  text "KEYPAD COM-08653" at 9.75,25.75 h0.64
  text "DISPLAY MSP3520" at 78,25.75 h0.64
  text "GYRO GY-50" at 100.75,25.75 h0.64
  text "KEYPAD COM-08653" at 108.75,25.75 h0.64
  text "DISPLAY MSP3520" at 177,25.75 h0.64
  text "9DOF" at 2,19.25 h0.64
  text "H0 & H1" at 90.108,19.25 h0.64
  text "9DOF" at 101,19.25 h0.64
  text "H0 & H1" at 189.108,19.25 h0.64
  text "RFID RC522" at 77.625,15.361 h0.64
  text "RFID RC522" at 176.625,15.361 h0.64
  text "H1" at 93.45,15.25 h0.64
  text "H1" at 192.45,15.25 h0.64
  text "Variant 1" at 26,14 h5
  text "Variant 6" at 125,14 h5
  text "TCS34725" at 1.75,12.795 h0.64
  text "TCS34725" at 100.75,12.795 h0.64
  text "LEDS" at 8.858,12.75 h0.64
  text "BUTTONS" at 15.608,12.75 h0.64
  text "LEDS" at 107.858,12.75 h0.64
  text "BUTTONS" at 114.608,12.75 h0.64
  text "H0" at 89.784,6.361 h0.64
  text "H0" at 188.784,6.361 h0.64
  text "ENCODER" at 2,6.25 h0.64
  text "KY-038" at 8.608,6.25 h0.64
  text "GL5516" at 15.75,6.25 h0.64
  text "GP2Y0A02YK0F" at 77.67,6.25 h0.64
  text "ENCODER" at 101,6.25 h0.64
  text "KY-038" at 107.608,6.25 h0.64
  text "GL5516" at 114.75,6.25 h0.64
  text "GP2Y0A02YK0F" at 176.67,6.25 h0.64
  text "PWR" at 23.036,5.334 h1
  text "ADC" at 28.872,5.334 h1
  text "ENCODER" at 33.329,5.334 h0.8
  text "KEYPAD" at 40.216,5.334 h1
  text "SONIC" at 48.536,5.334 h1
  text "RFID" at 55.486,5.334 h1
  text "DISPLAY" at 63.846,5.334 h1
  text "PWR" at 122.036,5.334 h1
  text "ADC" at 127.872,5.334 h1
  text "ENCODER" at 132.329,5.334 h0.8
  text "KEYPAD" at 139.216,5.334 h1
  text "SONIC" at 147.536,5.334 h1
  text "RFID" at 154.486,5.334 h1
  text "DISPLAY" at 162.846,5.334 h1
  text "Commutation board for Raspberry Pi" at 31,1 h0.8
  text "Commutation board for Raspberry Pi" at 130,1 h0.8
Board:
  lines w0.1: 0,40 ccw(c4,40) 4,36 23.5,36 cw(c23.5,35.5) 23.5,35 4,35 ccw(c4,31) 0,31 0,4 ccw(c4,4) 4,0 94,0 ccw(c94,4) 98,4 98,9.5 cw(c98.5,9.5) 99,9.5 99,4 ccw(c103,4) 103,0 193,0 ; 0,67 cw(c4,67) 4,71 23.5,71 ccw(c23.5,71.5) 23.5,72 4,72 cw(c4,76) 0,76 ; 0,103 cw(c4,103) 4,107 23.5,107 ccw(c23.5,107.5) 23.5,108 4,108 cw(c4,112) 0,112 ; 0,139 cw(c4,139) 4,143 23.5,143 ccw(c23.5,143.5) 23.5,144 4,144 cw(c4,148) 0,148 ; 0,175 cw(c4,175) 4,179 94,179 cw(c94,175) 98,175 98,169.5 ccw(c98.5,169.5) 99,169.5 99,175 cw(c103,175) 103,179 193,179 ; 173.5,179 193,179 ; 173.5,144 ccw(c173.5,143.5) 173.5,143 193,143 cw(c193,139) 197,139 197,112 cw(c193,112) 193,108 173.5,108 ccw(c173.5,107.5) 173.5,107 193,107 cw(c193,103) 197,103 197,76 cw(c193,76) 193,72 173.5,72 ccw(c173.5,71.5) 173.5,71 193,71 cw(c193,67) 197,67 197,40 cw(c193,40) 193,36 173.5,36 ccw(c173.5,35.5) 173.5,35 193,35 cw(c193,31) 197,31 197,4 ; 173.5,144 193,144 ; 173.5,144 193,144 ; 193,0 ccw(c193,4) 197,4 ; 193,0 ccw(c193,4) 197,4 ; 193,144 ccw(c193,148) 197,148 ; 193,144 ccw(c193,148) 197,148 ; 193,179 cw(c193,175) 197,175 ; 193,179 cw(c193,175) 197,175 ; 197,148 197,175 ; 197,148 197,175